# Altium PCB overlay dan masking.PcbDoc (part 1 of 3)
Units mil, origin at the board's own origin, x right, y up, seen from the top; angles counter-clockwise.
Board outline 6000 x 4000 mil, 2 copper layers (Top Layer, Bottom Layer); 120 components, 0 nets, 410 pads, 0 vias.
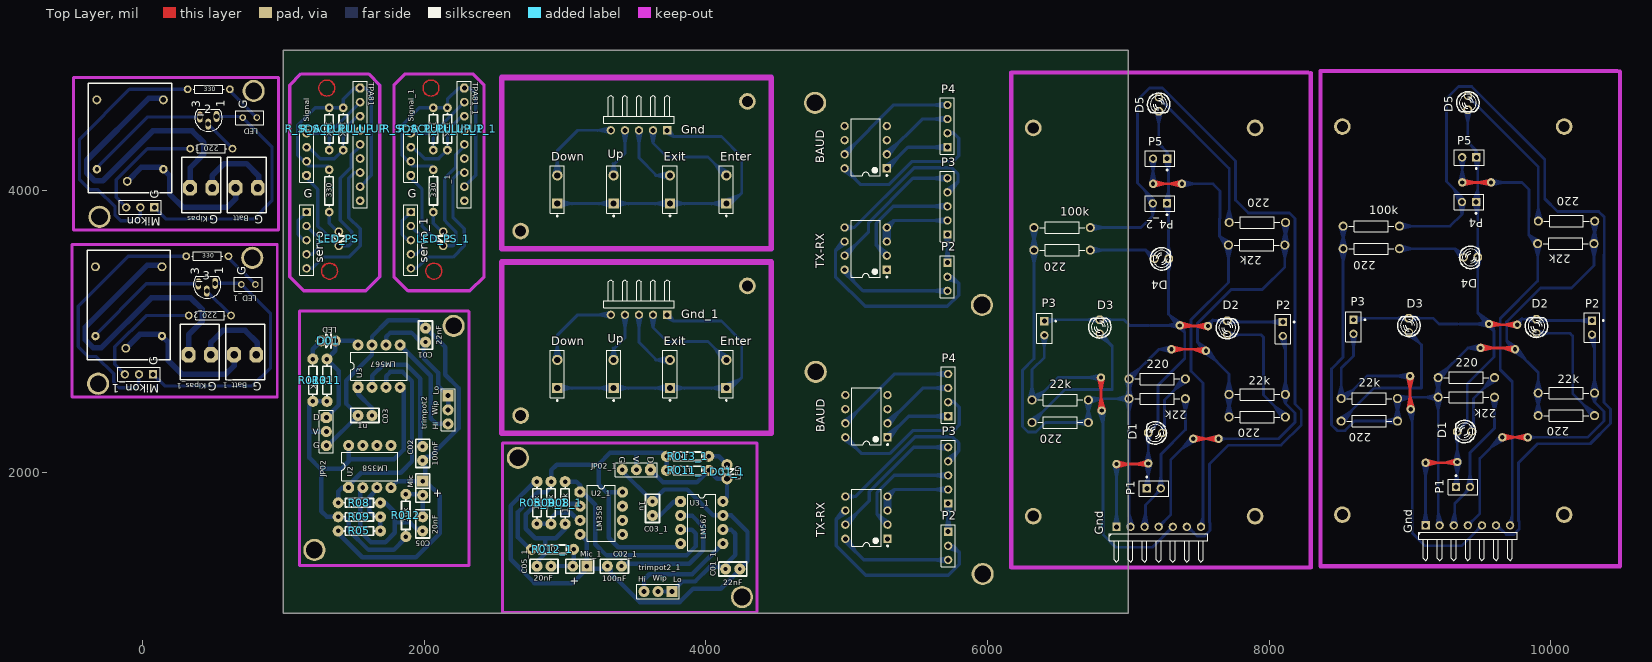
[diagram p0: Top Layer view]
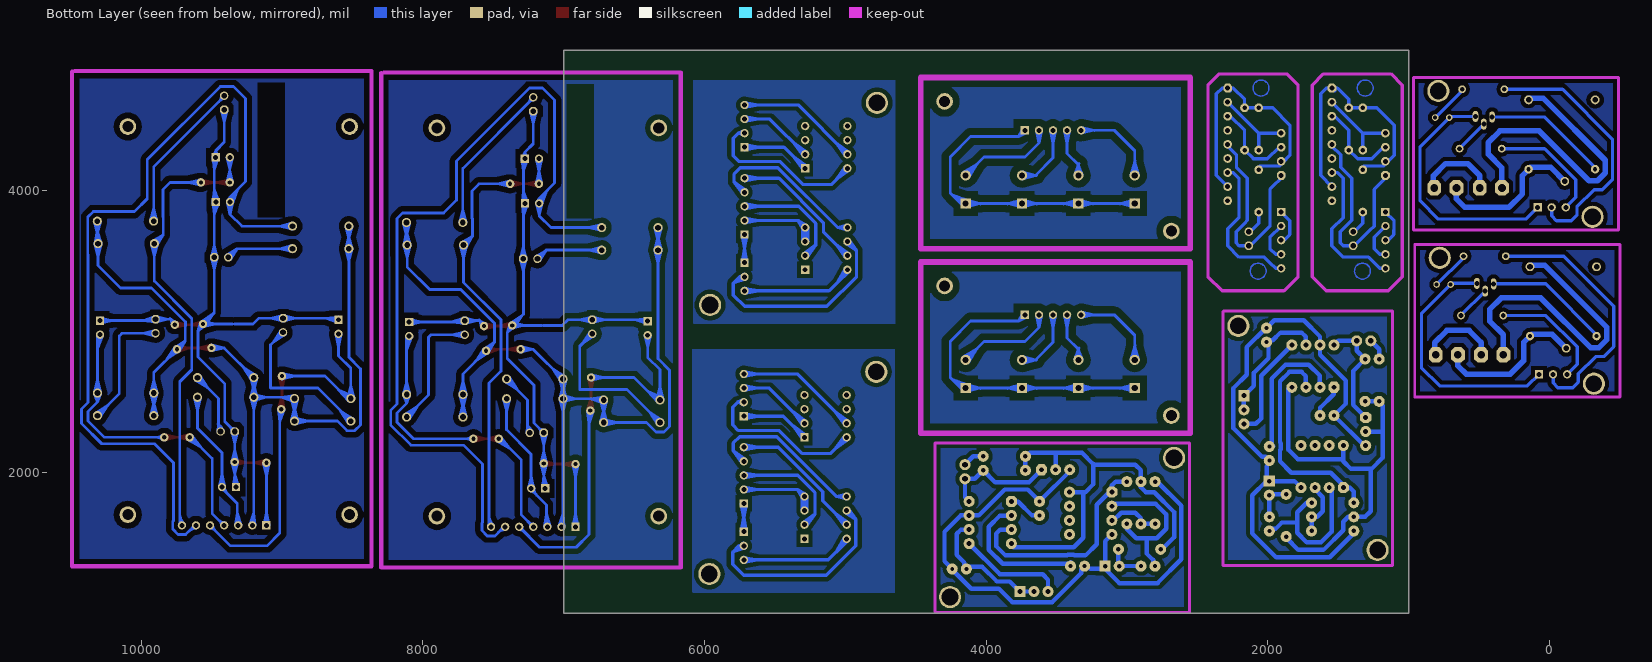
[diagram p1: Bottom Layer view, seen from below]

## Layer stack, top to bottom
Top Layer: signal copper 1.4
Dielectric: dielectric 12.6, FR-4, Dk 4.8
Bottom Layer: signal copper 1.4

## Board outline
1000,1000 7000,1000 7000,5000 1000,5000

## Design rules (kind name [scope] priority, off if disabled: settings)
Clearance [All] p1: gap=10
PolygonConnect [All] p1: connectstyle=Relief reliefconductorwidth=10 reliefentries=4 polygonreliefangle="90 Angle"
RoutingVias [All] p1: holewidth=28 width=50 viastyle="Through Hole" minholewidth=28 minwidth=50 maxholewidth=28 maxwidth=50
SilkscreenOverComponentPads [All] p1: minsilkscreentomaskgap=10
SolderMaskExpansion [All] p1: expansion=4
Width [All] p1: maxlimit=10 minlimit=10 preferedwidth=10
27 further rules are at their usual default settings.

## Components (designator, comment, footprint, x,y, rotation, side; value= is the part's Value field where it differs from the comment)
22k "1k" My_axial-0.4 9400,2535 r0 top (schematic designator Rp1)
22k "1k" My_axial-0.4 10110,2565 r0 top (schematic designator Rp2)
22k "1k" My_axial-0.4 8710,2525 r180 top (schematic designator Rp3)
22k "1k" My_axial-0.4 10105,3625 r180 top (schematic designator Rp5)
22k "1k" My_axial-0.4 7205,2525 r0 top (schematic designator Rp1)
22k "1k" My_axial-0.4 7915,2555 r0 top (schematic designator Rp2)
22k "1k" My_axial-0.4 6515,2515 r180 top (schematic designator Rp3)
22k "1k" My_axial-0.4 7910,3615 r180 top (schematic designator Rp5)
100k "1k" My_axial-0.4 8725,3750 r0 top (schematic designator Rp4)
100k "1k" My_axial-0.4 6530,3740 r0 top (schematic designator Rp4)
220 "1k" My_axial-0.4 9400,2675 r0 top (schematic designator R1)
220 "1k" My_axial-0.4 10110,2405 r0 top (schematic designator R2)
220 "1k" My_axial-0.4 8710,2365 r180 top (schematic designator R3)
220 "1k" My_axial-0.4 8725,3590 r0 top (schematic designator R4)
220 "1k" My_axial-0.4 10110,3785 r180 top (schematic designator R5)
220 "1k" My_axial-0.4 7205,2665 r0 top (schematic designator R1)
220 "1k" My_axial-0.4 7915,2395 r0 top (schematic designator R2)
220 "1k" My_axial-0.4 6515,2355 r180 top (schematic designator R3)
220 "1k" My_axial-0.4 6530,3580 r0 top (schematic designator R4)
220 "1k" My_axial-0.4 7915,3775 r180 top (schematic designator R5)
220_1 "Res1" AXIAL-0.3#1 488.7,4300 r0 top (schematic designator R1)
220_2 "Res1" AXIAL-0.3#1 478.7,3115 r0 top (schematic designator R1)
_1 "330" AXIAL0.3 2065,3850 r90 top
_2 "Comment" AXIAL-0.3#1 470.28,4721.42 r180 top
_3 "Comment" AXIAL-0.3#1 460.28,3536.42 r180 top
Batt "" BIGCON2 737.99,4020.63 r180 top
Batt_1 "" BIGCON2 727.99,2835.63 r180 top
BAUD "SW-DIP4" DIP-8#1 5140,2400 r180 top (schematic designator S3)
BAUD "SW-DIP4" DIP-8#1 5135,4310 r180 top (schematic designator S3)
C01 "22nF" RAD-0.1#1 2009.45,2925.63 r90 top
C01_1 "22nF" RAD-0.1#1 4140.63,1315.55 r0 top
C02 "100nF" RAD-0.1#1 1989.45,2085.63 r90 top
C02_1 "100nF" RAD-0.1#1 3300.63,1335.55 r0 top
C03 "1u" RAD-0.1#1 1529.45,2405.63 r0 top
C03_1 "1u" RAD-0.1#1 3620.63,1795.55 r270 top
C05 "20nF" RAD-0.1#1 1989.45,1585.63 r90 top
C05_1 "20nF" RAD-0.1#1 2800.63,1335.55 r0 top
D1 "LED" My_LED3MM 9385.43,2291.46 r180 top
D1 "LED" My_LED3MM 7190.43,2281.46 r180 top
D01 "LED" DIODAKU#1 1309.45,2925.63 r90 top
D01_1 "LED" DIODAKU#1 4140.63,2015.55 r0 top
D2 "LED" My_LED3MM 9897.24,3038.86 r90 top
D2 "LED" My_LED3MM 7702.24,3028.86 r90 top
D3 "LED" My_LED3MM 8991.73,3045 r90 top
D3 "LED" My_LED3MM 6796.73,3035 r90 top
D4 "LED" My_LED3MM 9430.43,3527.56 r0 top
D4 "LED" My_LED3MM 7235.43,3517.56 r0 top
D5 "LED" My_LED3MM 9410,4625 r270 top
D5 "LED" My_LED3MM 7215,4615 r270 top
Down "SW-PB" SPST-2 2945,2700 r90 top
Down "SW-PB" SPST-2 2945,4010 r90 top
Enter "SW-PB" SPST-2 4145,2700 r90 top
Enter "SW-PB" SPST-2 4145,4010 r90 top
Exit "SW-PB" SPST-2 3745,2700 r90 top (schematic designator Close)
Exit "SW-PB" SPST-2 3745,4010 r90 top (schematic designator Close)
Gnd "Header 7H" HDR1X7H 9110,1625 r0 top (schematic designator "Header 7")
Gnd "Header 7H" HDR1X7H 6915,1615 r0 top (schematic designator "Header 7")
Gnd "Header 5H" HDR1X5H 3725,4430 r180 top
Gnd_1 "Header 5H" HDR1X5H 3725,3120 r180 top (schematic designator Gnd)
JP02 "HEADER 3" HDR1X3#1 1304.85,2391.35 r270 top
JP02_1 "HEADER 3" HDR1X3#1 3606.35,2020.15 r180 top
Kipas "" BIGCON2 415.16,4020.63 r180 top
Kipas_1 "" BIGCON2 405.16,2835.63 r180 top
LED "Comment" RAD-0.1#2 761.61,4520.63 r180 top
LED_1 "Comment" RAD-0.1#2 751.61,3335.63 r180 top
LED_PS "LED" DIODAKU#2 1385,3670 r0 top
LED_PS_1 "LED" DIODAKU#2 2125,3670 r0 top
Mic "" SIP-2 1989.45,1939.85 r270 top
Mic_1 "" SIP-2 3154.85,1335.55 r180 top
Mikon "mikon-driver" HDR1X3#2 84.45,3882.83 r180 top (schematic designator P2)
Mikon_1 "mikon-driver" HDR1X3#2 74.45,2697.83 r180 top (schematic designator P2)
P1 "Photo Sen" PIN2 9325.43,1897.76 r0 top
P1 "Photo Sen" PIN2 7130.43,1887.76 r0 top
P2 "Photo Sen" PIN2 10290.94,3078.86 r270 top
P2 "Photo Sen" PIN2 8095.94,3068.86 r270 top
P2 "Header 3" HDR1X3#2 5720,1580 r270 top
P2 "Header 3" HDR1X3#2 5715,3490 r270 top
P3 "Photo Sen" PIN2 8598.03,3085 r270 top
P3 "Photo Sen" PIN2 6403.03,3075 r270 top
P3 "Header 5" HDR1X5 5720,1780 r90 top
P3 "Header 5" HDR1X5 5715,3690 r90 top
P4 "Photo Sen" PIN2 9468.54,3921.26 r180 top
P4 "Header 4" HDR1X4#1 5720,2400 r90 top
P4 "Header 4" HDR1X4#1 5715,4310 r90 top
P4_2 "Photo Sen" PIN2 7273.54,3911.26 r180 top (schematic designator P4)
P5 "Photo Sen" PIN2 9470,4238.66 r180 top
P5 "Photo Sen" PIN2 7275,4228.66 r180 top
R05 "10k" AXIAL-0.3#2 1689.45,1585.63 r180 top
R05_1 "10k" AXIAL-0.3#2 2800.63,1635.55 r90 top
R08 "100k" AXIAL-0.3#2 1689.45,1785.63 r180 top locked
R08_1 "100k" AXIAL-0.3#2 3000.63,1635.55 r90 top locked
R09 "10k" AXIAL-0.3#2 1389.45,1685.63 r0 top
R09_1 "10k" AXIAL-0.3#2 2900.63,1935.55 r270 top
R011 "1k" AXIAL-0.3#2 1309.45,2805.63 r270 top
R011_1 "1k" AXIAL-0.3#2 4020.63,2015.55 r180 top
R012 "10k" AXIAL-0.3#2 1869.45,1545.63 r90 top locked
R012_1 "10k" AXIAL-0.3#2 2760.63,1455.55 r0 top locked
R013 "1K" AXIAL-0.3#2 1209.45,2805.63 r270 top
R013_1 "1K" AXIAL-0.3#2 4020.63,2115.55 r180 top
R_SCL_PULL_UP "10K" AXIAL0.3 1425,4290 r90 top
R_SCL_PULL_UP_1 "10K" AXIAL0.3 2165,4290 r90 top
R_SDA_PULL_UP "10K" AXIAL0.3 1325,4290 r90 top
R_SDA_PULL_UP_1 "10K" AXIAL0.3 2065,4290 r90 top
servo "Comment" HDR1X5 1165,3850 r270 top
servo_1 "Comment" HDR1X5 1905,3850 r270 top
Signal "" HDR1X4#2 1165,4110 r90 top
Signal_1 "" HDR1X4#2 1905,4110 r90 top
TPA81 "HEADER 9" HDR1X9 1545,4730 r270 top
TPA81_1 "HEADER 9" HDR1X9 2285,4730 r270 top
trimpot2 "Header 3" HDR1X3#3 2169.45,2545.63 r270 top (schematic designator DigPOT)
trimpot2_1 "Header 3" HDR1X3#3 3760.63,1155.55 r180 top (schematic designator DigPOT)
TX-RX "SW-DIP4" DIP-8#1 5140,1680 r180 top (schematic designator S2)
TX-RX "SW-DIP4" DIP-8#1 5135,3590 r180 top (schematic designator S2)
U2 "LM358" DIP-8#2 1463.89,1892.61 r90 top
U2_1 "LM358" DIP-8#2 3107.61,1861.11 r0 top
U3 "LM567" DIP-8#2 1529.45,2605.63 r90 top
U3_1 "LM567" DIP-8#2 3820.63,1795.55 r0 top
Up "SW-PB" SPST-2 3345,2700 r90 top
Up "SW-PB" SPST-2 3345,4010 r90 top
? "330" AXIAL0.3 1325,3850 r90 top

## Footprints (in the part's own frame and the unit in brackets; to place one, negate y for a bottom-side part, rotate by r counter-clockwise, add the part's x,y. Pads: shape width x height; smd on the part's side, far side on the other; paste and mask are expansions set on the pad)
AXIAL0.3 [mil]
  round 62 hole 32: 1(0,0) 2(300,0)
  silkscreen extent 41,-30 259,30
AXIAL-0.3#1 [mm] "Axial Device, Thru-Hole; 2 Leads; 0.3 in Pin Spacing"
  round 1.4 hole 0.85: 1(-3.81,0) 2(3.81,0)
  silkscreen extent -2.77,-0.76 2.77,0.76
AXIAL-0.3#2 [mm]
  round 2 hole 0.813 mask+0.102: 1(0,0) 2(7.62,0)
  silkscreen extent 1.04,-0.76 6.58,0.76
BIGCON2 [mil]
  oct 98.42x110 hole 55: 1(-80,0) 2(77.48,0)
  silkscreen extent -139,-217 137,177
DIODAKU#1 [mil]
  round 78.74 hole 40 mask+4: A(9.5,40.5) K(9.5,-59.5)
  silkscreen extent -44,-34 66,30
DIODAKU#2 [mil]
  round 62 hole 40: A(9.5,40.5) K(9.5,-59.5)
  silkscreen extent -44,-34 66,30
DIP-8#1 [mm] "DIP; 8 Leads; Row Spacing 7.62 mm; Pitch 2.54 mm"
  rect 1.5x1.5 hole 0.9: 1(-3.81,3.81)
  round 1.5 hole 0.9: 2(-3.81,1.27) 3(-3.81,-1.27) 4(-3.81,-3.81) 5(3.81,-3.81) 6(3.81,-1.27) 7(3.81,1.27) 8(3.81,3.81)
  silkscreen extent -3.94,-5.15 2.65,5.23, body extent -3.6,-5.15 3.6,5.15, height 5.08
DIP-8#2 [mm]
  oct 2x2 hole 0.889 mask+0.102: 1(0,0)
  round 2 hole 0.889 mask+0.102: 2(0,-2.54) 3(0,-5.08) 4(0,-7.62) 5(7.62,-7.62) 6(7.62,-5.08) 7(7.62,-2.54) 8(7.62,0)
  silkscreen extent 1.27,-8.89 6.35,1.27
HDR1X3#1 [mm]
  oct 2x2 hole 0.889 mask+0.102: 1(0,0)
  round 2 hole 0.889 mask+0.102: 2(2.54,0) 3(5.08,0)
  silkscreen extent -1.27,-1.27 6.35,1.27
HDR1X3#2 [mm] "Connector; Header; 3 Position"
  rect 1.5x1.5 hole 0.9: 1(0,0)
  round 1.5 hole 0.9: 2(2.54,0) 3(5.08,0)
  silkscreen extent -1.27,-1.27 6.35,1.27
HDR1X3#3 [mm] "Connector; Header; 3 Position"
  rect 2x2 hole 0.9: 1(0,0)
  round 2 hole 0.9: 2(2.54,0) 3(5.08,0)
  silkscreen extent -1.27,-1.27 6.35,1.27
HDR1X4#1 [mm] "Connector; Header; 4 Position"
  rect 1.5x1.5 hole 0.9: 1(0,0)
  round 1.5 hole 0.9: 2(2.54,0) 3(5.08,0) 4(7.62,0)
  silkscreen extent -1.27,-1.27 8.89,1.27
HDR1X4#2 [mm]
  oct 1.575x1.575 hole 0.889: gnd_tpa(0,0)
  round 1.575 hole 0.889: scl(7.62,0) sda(5.08,0) vcc_tpa(2.54,0)
  silkscreen extent -1.27,-1.27 8.89,1.27
HDR1X5 [mm] "Connector; Header; 5 Position"
  rect 1.5x1.5 hole 0.9: 1(0,0)
  round 1.5 hole 0.9: 2(2.54,0) 3(5.08,0) 4(7.62,0) 5(10.16,0)
  silkscreen extent -1.27,-1.27 11.43,1.27
HDR1X5H [mm] "Connector; Header; 5 Position; Right Angle"
  rect 1.5x1.5 hole 0.9: 1(0,0)
  round 1.5 hole 0.9: 2(2.54,0) 3(5.08,0) 4(7.62,0) 5(10.16,0)
  silkscreen extent -1.27,-6.35 11.43,-1.27
HDR1X7H [mm] "Connector; Header; 7 Position; Right Angle"
  rect 1.5x1.5 hole 0.9: 1(0,0)
  round 1.5 hole 0.9: 2(2.54,0) 3(5.08,0) 4(7.62,0) 5(10.16,0) 6(12.7,0) 7(15.24,0)
  silkscreen extent -1.27,-6.35 16.51,-1.27
HDR1X9 [mil]
  round 62 hole 35: 4(300,0) 6(500,0) data_servo(600,0) gnd_servo(800,0) gnd_tpa(400,0) scl(200,0) sda(100,0) vcc_servo(700,0)
  oct 62x62 hole 35: vcc_tpa(0,0)
  silkscreen extent -50,-50 850,50
My_axial-0.4 [mil]
  round 65 hole 40: 1(-200.5,-0.5) 2(199.5,-0.5)
  silkscreen extent -160,-40 160,40
My_LED3MM [mil]
  round 60 hole 40: A(-50,0)
  oct 60x60 hole 40: K(50,0)
  silkscreen extent -80,-80 62,80
PIN2 [mm] "Photosensitive Diode; 2 Leads"
  rect 1.5x1.5 hole 0.9: 1(0,0)
  round 1.5 hole 0.9: 2(2.54,0)
  silkscreen extent -1.4,-1.4 3.94,2.17
RAD-0.1#1 [mm]
  round 2 hole 0.711 mask+0.102: 1(0,0) 2(2.54,0)
  silkscreen extent -1.27,-1.27 3.81,1.27
RAD-0.1#2 [mm] "Radial Cap, Thru-Hole; 2 Leads; 0.1 in Pin Spacing"
  round 1.2 hole 0.7: 1(-1.27,0) 2(1.27,0)
  silkscreen extent -2.54,-1.27 2.54,1.27
SIP-2 [mm] "Connector; Header; 2 Position"
  rect 2x2 hole 0.813 mask+0.102: 1(0,0)
  round 2 hole 0.813 mask+0.102: 2(2.54,0)
  silkscreen extent -1.27,-1.27 3.81,1.27
SPST-2 [mm] "Circuit Breaker; 2 Leads"
  rect 1.85x1.85 hole 1.1: 1(-2.54,0)
  round 1.85 hole 1.1: 2(2.54,0)
  silkscreen extent -4.89,-1.27 4.28,1.27

## Part data
22k 22k 22k 22k 22k 22k 22k 22k 100k 100k 220 220 220 220 220 220 220 220 220 220: library part Res, "resistor 1/4 wat"
220_1 220_2: "Resistor"
BAUD BAUD TX-RX TX-RX: "DIP Switch"
C01 C01_1 C02 C02_1 C03 C03_1 C05 C05_1: library part CAP, "Capacitor"
D1 D1 D2 D2 D3 D3 D4 D4 D5 D5: "Typical INFRARED GaAs LED"
Down Down Enter Enter Exit Exit Up Up: "Switch"
Gnd Gnd: "Header, 7-Pin, Right Angle"
Gnd Gnd_1: "Header, 5-Pin, Right Angle"
JP02 JP02_1: library part CON3, "Connector"
Mic Mic_1: library part "Header 2", "Header, 2-Pin"
Mikon Mikon_1: library part "Header 5", "Header, 5-Pin"
P1 P1 P2 P2 P3 P3 P4 P4_2 P5 P5: "Photosensitive Diode"
P2 P2 trimpot2 trimpot2_1: "Header, 3-Pin"
P3 P3: "Header, 5-Pin"
P4 P4: "Header, 4-Pin"
R05 R05_1 R08 R08_1 R09 R09_1 R011 R011_1 R012 R012_1 R013 R013_1: library part RES1
U2 U2_1: "Fast Settling Dual Operational Amplifier"

## Free pads (board coordinates)
  round 62.99 hole 39.37: 0(-334.06,3461.3) 0(-324.06,4646.3) 1(138.39,3461.3) 1(148.39,4646.3) 4(-118.46,2882.56) 4(-108.46,4067.56)
  round 157.48 hole 118.11: 0(-315.31,2630.91) 0(-305.31,3815.91) 0(779.17,3524.61) 0(789.17,4709.61) 0(4775,4625) 0(4780,2715) 0(5960,3190) 0(5965,1280)
  round 157.48 hole 118.11 mask+4: 0(1220.63,1450.67) 0(2208.82,3041.22) 0(2665.67,2104.37) 0(4256.22,1116.18)
  round 118.11 hole 78.74: 0(4295,3325) 0(4295,4635) 1(2685,2405) 1(2685,3715) 1(6324.29,1690.91) 1(8519.29,1700.91) 4(7899.09,1690.91) 4(10094.09,1700.91) 8(6324.29,4446.81) 8(8519.29,4456.81) 9(7899.09,4446.81) 9(10094.09,4456.81)
  round 60 hole 30: 0(6915,2060) 0(9110,2070) 1(7140.43,2065) 1(9335.43,2075) 2(138.39,2969.17) 2(148.39,4154.17) 2(7175,4050) 2(9370,4060) 3(-334.06,2969.17) 3(-324.06,4154.17) 3(7380,4050) 3(9575,4060) 4(6805,2675) 4(9000,2685) 5(6810,2440) 5(9005,2450) 6(7460,2240) 6(7565,3040) 6(9655,2250) 6(9760,3050) 7(7365,3045) 7(7640,2240) 7(9560,3055) 7(9835,2250) 8(7550,2865) 8(9745,2875) 9(7305,2875) 9(9500,2885)
  oval 39.37x78.74 hole 35.43: 1(515.39,3343.5) 1(525.39,4528.5) 2(456.34,3288.39) 2(466.34,4473.39) 3(397.28,3339.57) 3(407.28,4524.57)

## Nets (pads, with @x,y where several pads share a name; then routed paths per layer and width w, separated by ;. In a path a pad name is that pad's centre, name@x,y a point inside that pad or via, vN(x,y) a via of type N, cw(c..) or ccw(c..) an arc to the next point about the centre after c; other vN are vias at no path point)
pads on no net: 22k.1 22k.2 100k.1 100k.2 220.1 220.2 220_1.1 220_1.2 220_2.1 220_2.2 ?.1 ?.2 _1.1 _1.2 _2.1 _2.2 _3.1 _3.2 Batt.1 Batt.2 Batt_1.1 Batt_1.2 BAUD.1 BAUD.2 BAUD.3 BAUD.4 BAUD.5 BAUD.6 BAUD.7 BAUD.8 C01.1 C01.2 C01_1.1 C01_1.2 C02.1 C02.2 C02_1.1 C02_1.2 C03.1 C03.2 C03_1.1 C03_1.2 C05.1 C05.2 C05_1.1 C05_1.2 D1.A D01.A D01.K D1.K D01_1.A D01_1.K D2.A D2.K D3.A D3.K D4.A D4.K D5.A D5.K Down.1 Down.2 Enter.1 Enter.2 Exit.1 Exit.2 Gnd.1 Gnd.2 Gnd.3 Gnd.4 Gnd.5 Gnd.6 Gnd.7 Gnd_1.1 Gnd_1.2 Gnd_1.3 Gnd_1.4 Gnd_1.5 JP02.1 JP02.2 JP02.3 JP02_1.1 JP02_1.2 JP02_1.3 Kipas.1 Kipas.2 Kipas_1.1 Kipas_1.2 LED.1 LED.2 LED_1.1 LED_1.2 LED_PS.A LED_PS.K LED_PS_1.A LED_PS_1.K Mic.1 Mic.2 Mic_1.1 Mic_1.2 Mikon.1 Mikon.2 Mikon.3 Mikon_1.1 Mikon_1.2 Mikon_1.3 P1.1 P1.2 P2.1 P2.2 P2.3 P3.1 P3.2 P3.3 P3.4 P3.5 P4.1 P4.2 P4.3 P4.4 P4_2.1 P4_2.2 P5.1 P5.2 R05.1 R05.2 R05_1.1 R05_1.2 R08.1 R08.2 R08_1.1 R08_1.2 R09.1 R09.2 R09_1.1 R09_1.2 R011.1 R011.2 R011_1.1 R011_1.2 R012.1 R012.2 R012_1.1 R012_1.2 R013.1 R013.2 R013_1.1 R013_1.2 R_SCL_PULL_UP.1 R_SCL_PULL_UP.2 R_SCL_PULL_UP_1.1 R_SCL_PULL_UP_1.2 R_SDA_PULL_UP.1 R_SDA_PULL_UP.2 R_SDA_PULL_UP_1.1 R_SDA_PULL_UP_1.2 servo.1 servo.2 servo.3 servo.4 servo.5 servo_1.1 servo_1.2 servo_1.3 servo_1.4 servo_1.5 Signal.gnd_tpa Signal.scl Signal.sda Signal.vcc_tpa Signal_1.gnd_tpa Signal_1.scl Signal_1.sda Signal_1.vcc_tpa TPA81.4 TPA81.6 TPA81.data_servo TPA81.gnd_servo TPA81.gnd_tpa TPA81.scl TPA81.sda TPA81.vcc_servo TPA81.vcc_tpa TPA81_1.4 TPA81_1.6 TPA81_1.data_servo TPA81_1.gnd_servo TPA81_1.gnd_tpa TPA81_1.scl TPA81_1.sda TPA81_1.vcc_servo TPA81_1.vcc_tpa trimpot2.1 trimpot2.2 trimpot2.3 trimpot2_1.1 trimpot2_1.2 trimpot2_1.3 TX-RX.1 TX-RX.2 TX-RX.3 TX-RX.4 TX-RX.5 TX-RX.6 TX-RX.7 TX-RX.8 U2.1 U2.2 U2.3 U2.4 U2.5 U2.6 U2.7 U2.8 U2_1.1 U2_1.2 U2_1.3 U2_1.4 U2_1.5 U2_1.6 U2_1.7 U2_1.8 U3.1 U3.2 U3.3 U3.4 U3.5 U3.6 U3.7 U3.8 U3_1.1 U3_1.2 U3_1.3 U3_1.4 U3_1.5 U3_1.6 U3_1.7 U3_1.8 Up.1 Up.2